# Altium PCB RealimentacionLineal.PcbDoc
Units mm, origin at the board's own origin, x right, y up, seen from the top; angles counter-clockwise.
Board outline 55.88 x 50 mm, 2 copper layers (Top Layer, Bottom Layer); 25 components, 18 nets, 69 pads, 12 vias.
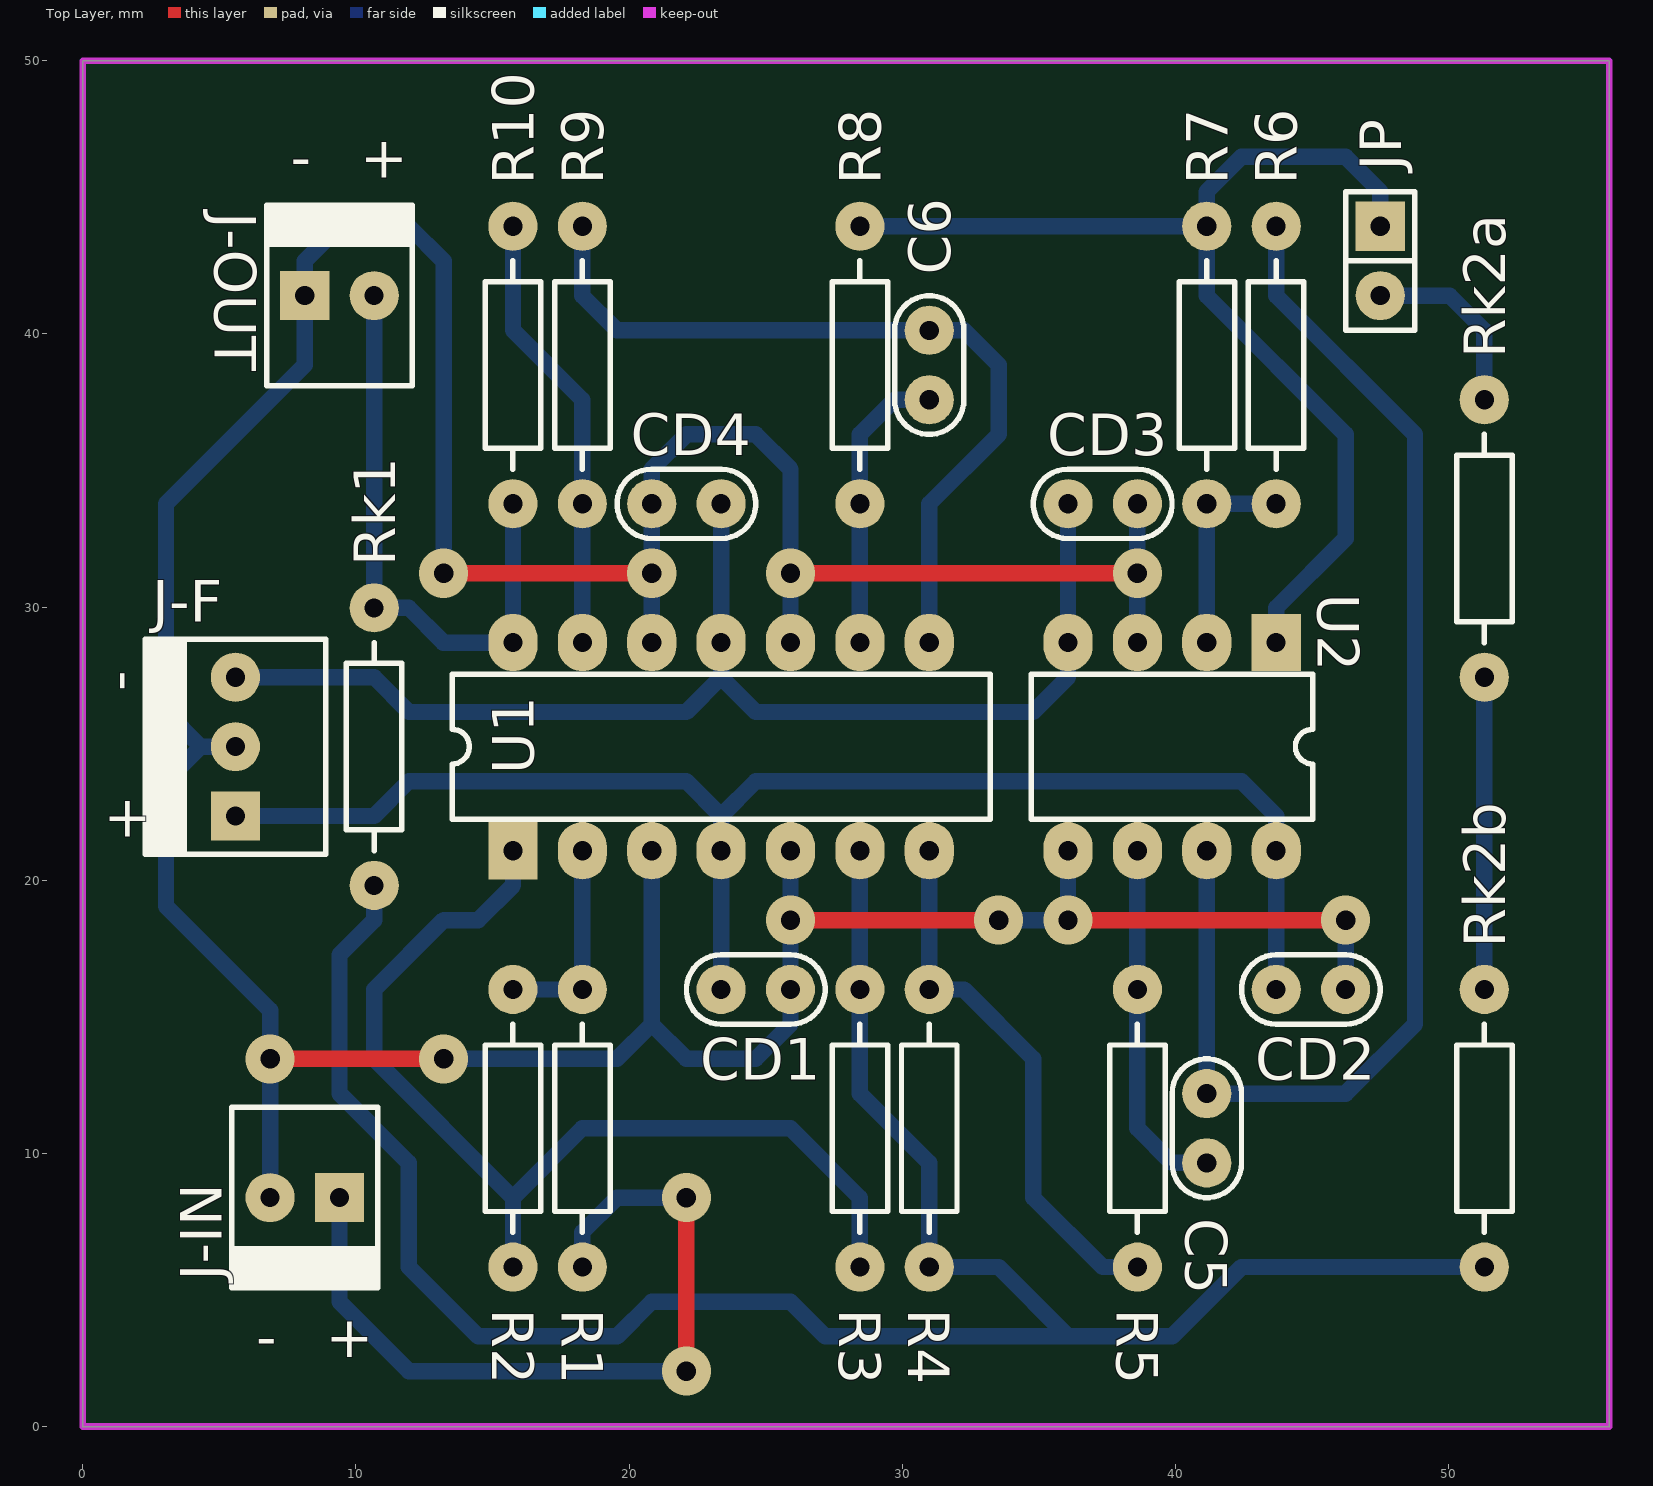
[diagram p0: Top Layer view]
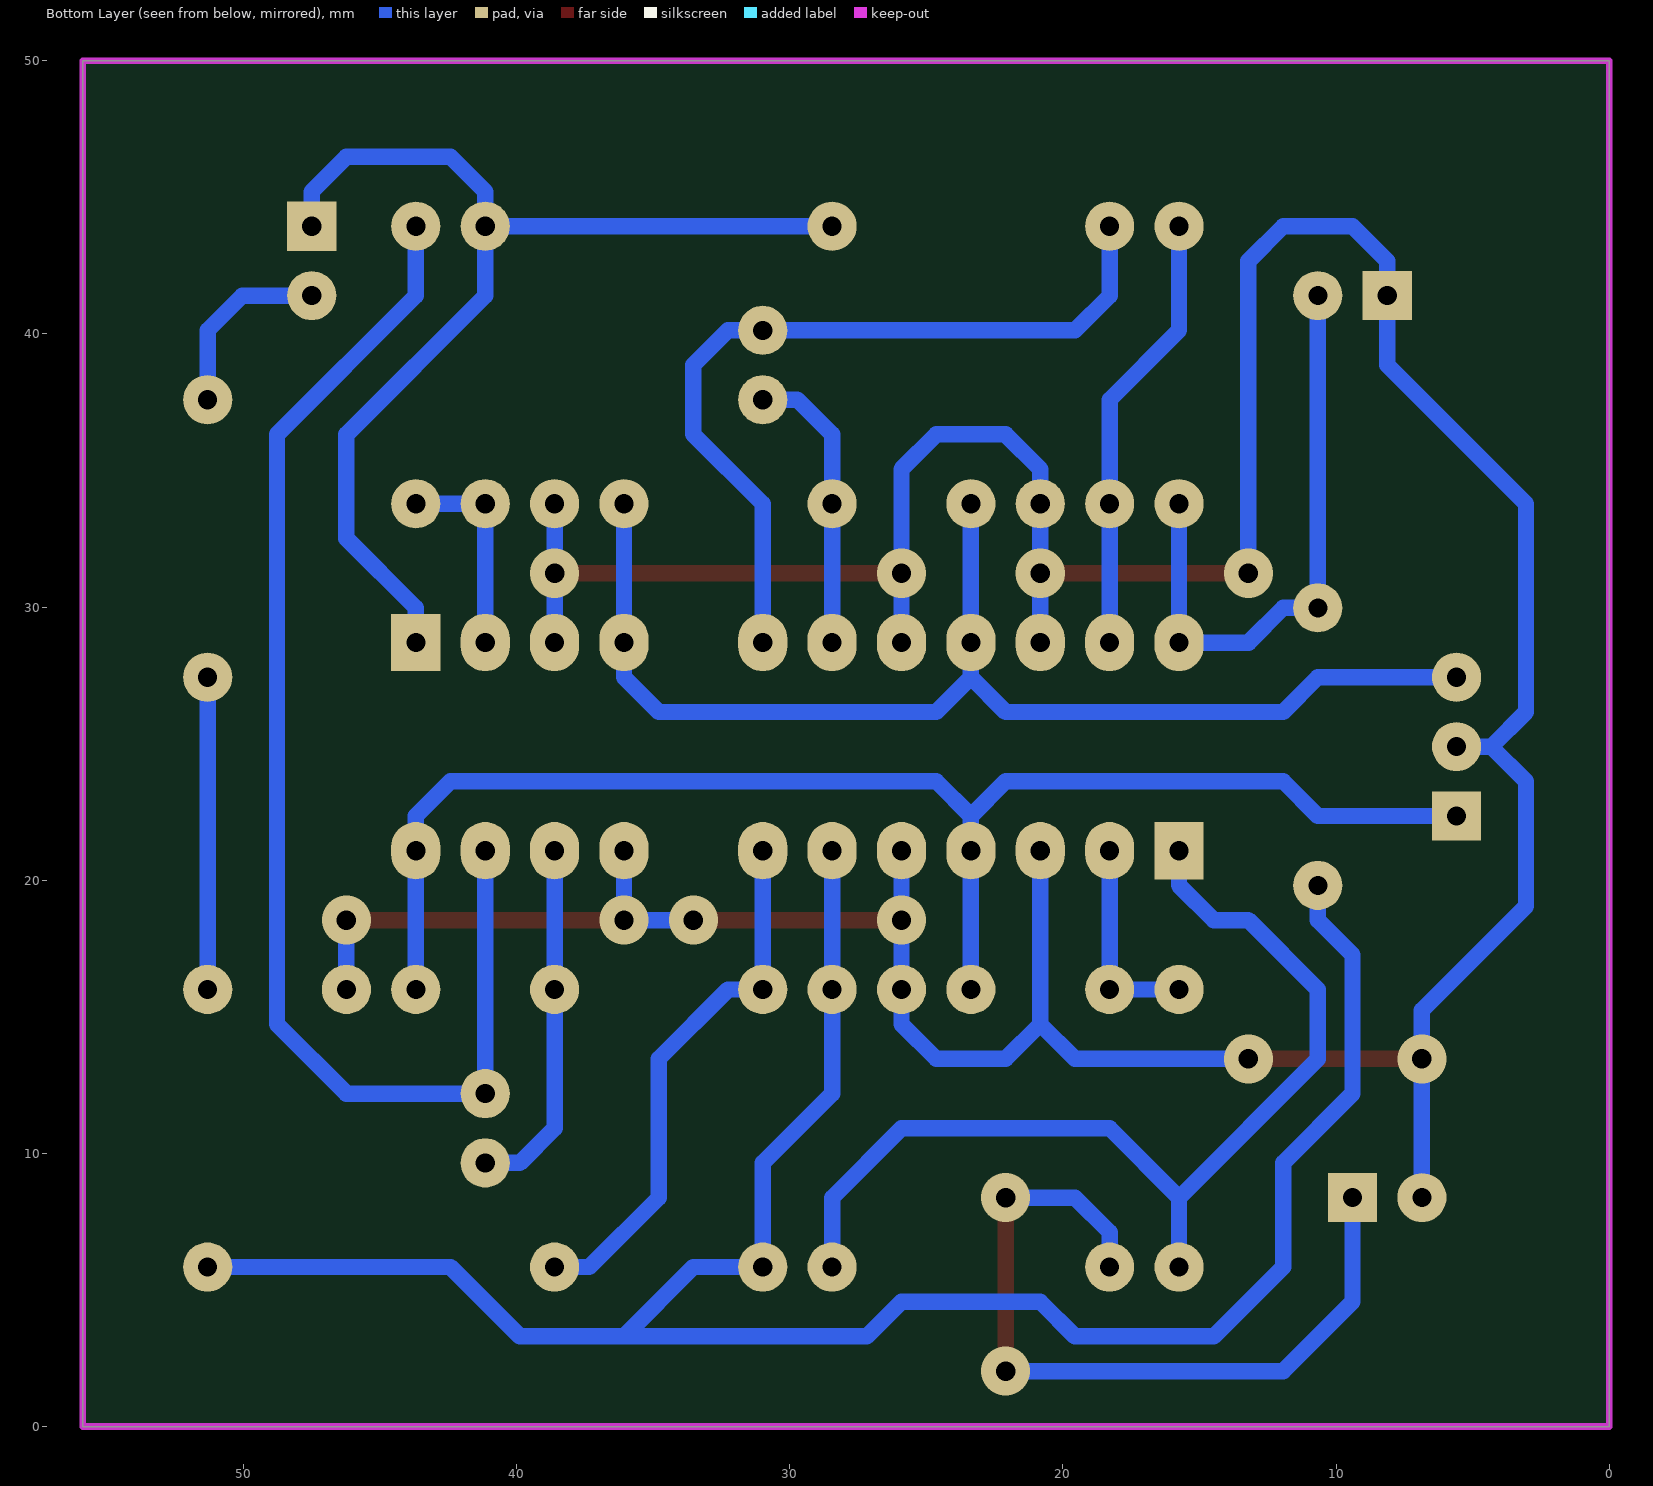
[diagram p1: Bottom Layer view, seen from below]
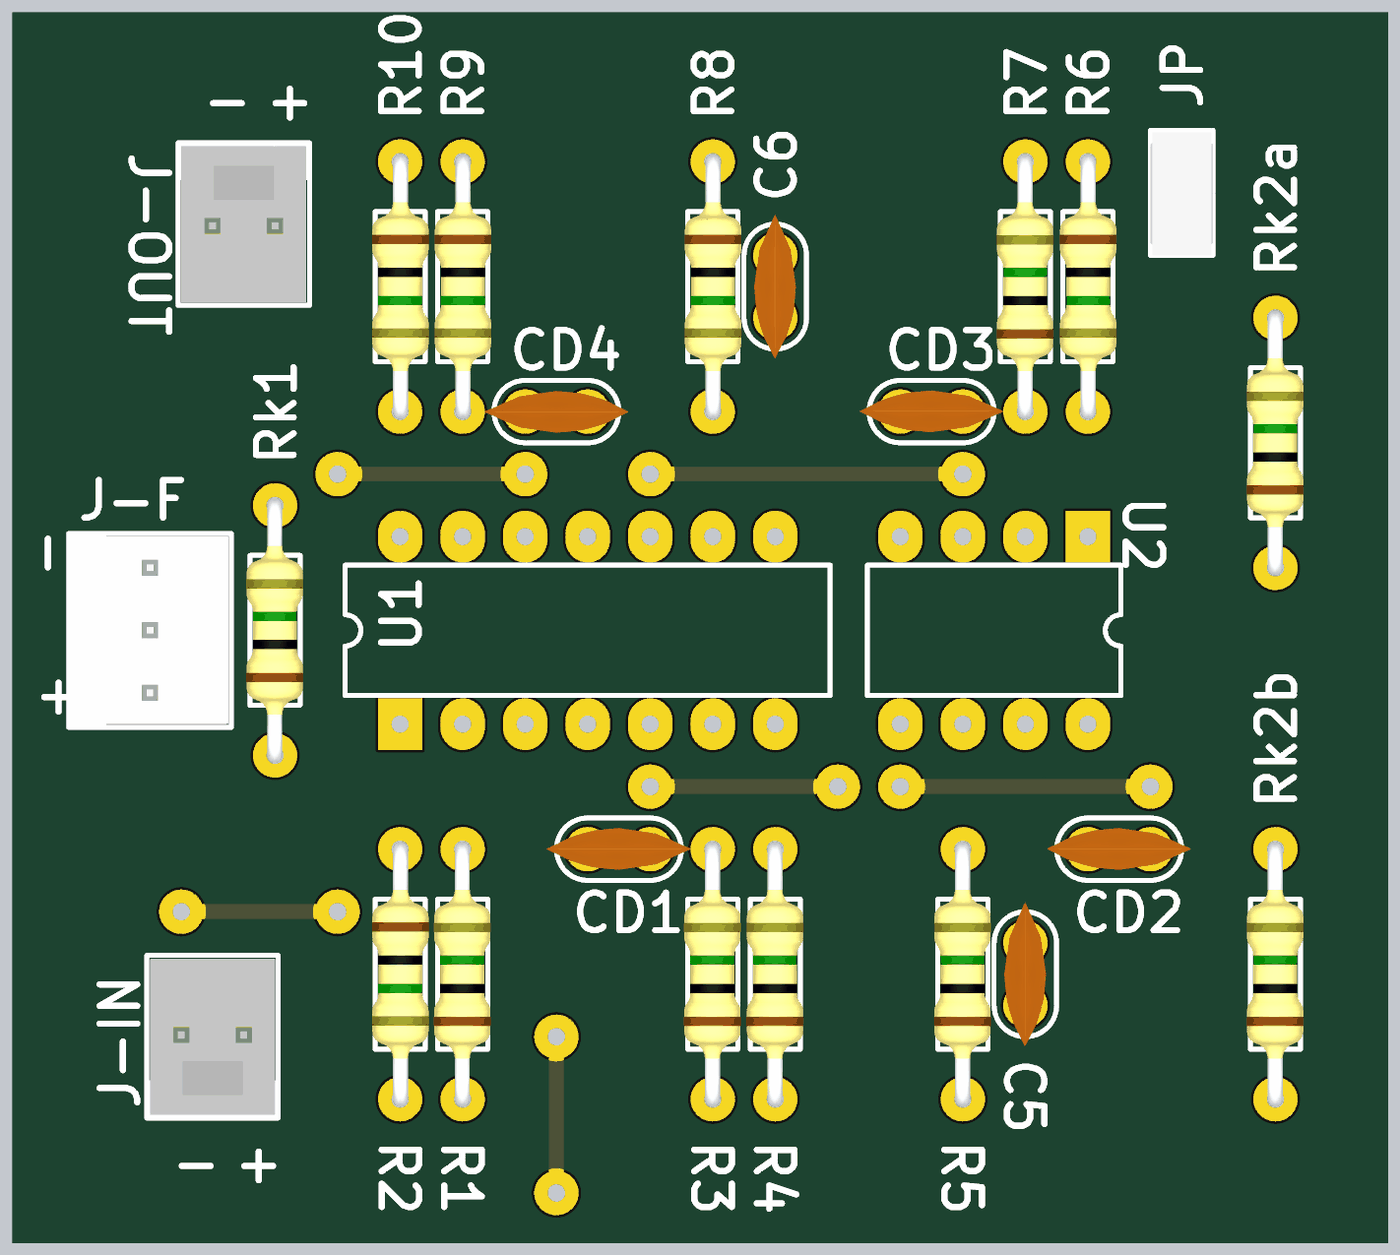
[diagram p2: 3D render of the assembled board from above, using the file's embedded part models]

## Layer stack, top to bottom
Top Solder: solder mask 0.0102, Solder Resist, Dk 3.5
Top Layer: signal copper 0.0356
Dielectric 1: dielectric 0.32, FR-4, Dk 4.8
Bottom Layer: signal copper 0.0356
Bottom Solder: solder mask 0.0102, Solder Resist, Dk 3.5

## Board outline
0,0 0,50 55.88,50 55.88,0

## Design rules (kind name [scope] priority, off if disabled: settings)
Clearance [All] p1: gap=0.6 ignorepadtopadclearanceinfootprint=FALSE
ComponentClearance [All] p1: gap=0.2 collisioncheckmode=3 verticalgap=0.254 showdistances=FALSE
PolygonConnect [All] p1: connectstyle=Relief reliefconductorwidth=0.254 reliefentries=4 polygonreliefangle="90 Angle" airgapwidth=0.254
RoutingVias [All] p1: holewidth=0.711 width=1.8 viastyle="Through Hole" minholewidth=0.711 minwidth=1.8 maxholewidth=0.711 maxwidth=1.8
SolderMaskExpansion [All] p1: expansion=0.102
Width [All] p1: maxlimit=0.6 minlimit=0.6 preferedwidth=0.6
29 further rules are at their usual default settings.

## Components (designator, comment, footprint, x,y, rotation, side; value= is the part's Value field where it differs from the comment)
C5 "1u" CAP100 41.148,10.922 r90 top
C6 "1u" CAP100 30.988,38.862 r90 top
CD1 "100n" CAP100 24.638,16.002 r0 top
CD2 "100n" CAP100 44.958,16.002 r0 top
CD3 "100n" CAP100 37.338,33.782 r0 top
CD4 "100n." CAP100 22.098,33.782 r180 top
J-F "FUENTE" MOLEX3 5.588,22.352 r90 top
J-IN "INPUT" MOLEX2 9.398,8.382 r180 top
J-OUT "OUTPUT" MOLEX2 8.128,41.402 r0 top
JP "JUMPER" JUMPER2 47.498,42.672 r270 top
R1 "10K" RES400 18.288,5.842 r90 top
R2 "10K" RES400 15.748,16.002 r270 top
R3 "10K" RES400 28.448,5.842 r90 top
R4 "10K" RES400 30.988,5.842 r90 top
R5 "100K" RES400 38.608,5.842 r90 top
R6 "10K" RES400 43.688,43.942 r270 top
R7 "10K" RES400 41.148,33.782 r90 top
R8 "47K" RES400 28.448,43.942 r270 top
R9 "10K" RES400 18.288,43.942 r270 top
R10 "10K" RES400 15.748,43.942 r270 top
Rk1 "10K" RES400 10.668,19.812 r90 top
Rk2a "6K8" RES400 51.308,27.432 r90 top
Rk2b "330" RES400 51.308,5.842 r90 top
U1 "TL084N" N014 23.368,24.892 r0 top
U2 "TL082JG" JG008 39.878,24.892 r180 top

## Footprints (in the part's own frame and the unit in brackets; to place one, negate y for a bottom-side part, rotate by r counter-clockwise, add the part's x,y. Pads: shape width x height; smd on the part's side, far side on the other; paste and mask are expansions set on the pad)
CAP100 [mm]
  round 1.8 hole 0.7: 1(-1.27,0) 2(1.27,0)
  silkscreen extent -2.54,-1.27 2.54,1.27, body extent -2.92,-0.84 2.92,0.86, height 6.12
JG008 [mm] "DIP; 8 Leads; Row Spacing 7.62 mm; Pitch 2.54 mm"
  rect 1.8x2.1 hole 0.7: 1(-3.81,-3.81)
  oval 1.8x2.1 hole 0.7: 2(-1.27,-3.81) 3(1.27,-3.81) 4(3.81,-3.81) 5(3.81,3.81) 6(1.27,3.81) 7(-1.27,3.81) 8(-3.81,3.81)
  silkscreen extent -5.15,-2.65 5.15,2.65
JUMPER2 [mm]
  rect 1.8x1.8 hole 0.7: 1(-1.27,0)
  round 1.8 hole 0.7: 2(1.27,0)
  silkscreen extent -2.54,-1.27 2.54,1.27, body extent -2.46,-1.27 2.54,1.27, height 9.5
MOLEX2 [mm]
  rect 1.8x1.8 hole 0.7: 1(0,0)
  round 1.8 hole 0.7: 2(2.54,0)
  silkscreen extent -1.4,-3.3 3.94,3.3, body extent -1.27,-3.17 3.81,3.18, height 10.74
MOLEX3 [mm]
  rect 1.8x1.8 hole 0.7: 1(0,0)
  round 1.8 hole 0.7: 2(2.54,0) 3(5.08,0)
  silkscreen extent -1.4,-3.3 6.48,3.3, body extent -1.27,-3.17 6.35,3.18, height 10.74
N014 [mm] "DIP; 14 Leads; Row Spacing 7.62 mm; Pitch 2.54 mm"
  rect 1.8x2.1 hole 0.7: 1(-7.62,-3.81)
  oval 1.8x2.1 hole 0.7: 2(-5.08,-3.81) 3(-2.54,-3.81) 4(0,-3.81) 5(2.54,-3.81) 6(5.08,-3.81) 7(7.62,-3.81) 8(7.62,3.81) 9(5.08,3.81) 10(2.54,3.81) 11(0,3.81) 12(-2.54,3.81) 13(-5.08,3.81) 14(-7.62,3.81)
  silkscreen extent -9.85,-2.65 9.85,2.65
RES400 [mm]
  round 1.8 hole 0.7: 1(0,0) 2(10.16,0)
  silkscreen extent 1.27,-1.02 8.89,1.02, body extent -0.3,-1.14 10.46,1.17, height 2.43

## Part data
C5 C6 CD1 CD2 CD3 CD4: library part CAP
J-F: library part MOLEX3
J-IN J-OUT: library part MOLEX2
R1 R2 R3 R4 R5 R6 R7 R8 R9 R10 Rk1 Rk2a Rk2b: library part RES
U1 U2: "JFET-Input Operational Amplifier", ComponentLink1Description="Manufacturer Link", ComponentLink1URL=http://www.ti.com/, ComponentLink2Description=Datasheet, DatasheetVersion=Feb-1999, LatestRevisionDate=04-Mar-2005, LatestRevisionNote="Stylized 3D Model Added.", Published=16-Jan-2001, Publisher="Altium Limited"
  U1: ComponentLink2URL=http://www-s.ti.com/sc/ds/tl084.pdf, PackageDescription="DIP; 14 Leads; Row Spacing 7.62 mm; Pitch 2.54 mm", PackageReference=N014, PackageVersion=Oct-1995
  U2: ComponentLink2URL=http://www-s.ti.com/sc/ds/tl082.pdf, PackageDescription="DIP; 8 Leads; Row Spacing 7.62 mm; Pitch 2.54 mm", PackageReference=JG008, PackageVersion=Jan-1995

## Via types
v1: diameter 1.8, hole 0.711, Top Layer to Bottom Layer, 12 vias

## Nets (pads, with @x,y where several pads share a name; then routed paths per layer and width w, separated by ;. In a path a pad name is that pad's centre, name@x,y a point inside that pad or via, vN(x,y) a via of type N, cw(c..) or ccw(c..) an arc to the next point about the centre after c; other vN are vias at no path point)
+12V: CD1.1 CD2.1 J-F.1 U1.4 U2.8 | length 52.9
  Bottom Layer w0.6: J-F.1 10.668,22.352 11.938,23.622 22.098,23.622 23.368,22.352 ; CD1.1 U1.4 23.368,22.352 ; CD2.1 U2.8 43.688,22.352 42.418,23.622 24.638,23.622 23.368,22.352
-12V: CD3.1 CD4.1 J-F.3 U1.11 U2.4 | length 45.3
  Bottom Layer w0.6: J-F.3 10.668,27.432 11.938,26.162 22.098,26.162 23.368,27.432 ; CD4.1 U1.11 23.368,27.432 ; CD3.1 U2.4 36.068,27.432 34.798,26.162 24.638,26.162 23.368,27.432
GND: CD1.2 CD2.2 CD3.2 CD4.2 J-F.2 J-IN.2 J-OUT.1 U1.3 U1.5 U1.10 U1.12 U2.3 U2.5 | length 160.8
  Top Layer w0.6: v1(6.858,13.462) v1(13.208,13.462) ; v1(13.208,31.242) v1(20.828,31.242) ; v1(25.908,18.542) v1(33.528,18.542) ; v1(25.908,31.242) v1(38.608,31.242) ; v1(36.068,18.542) v1(46.228,18.542)
  Bottom Layer w0.6: J-F.2 4.318,24.892 ; J-IN.2 v1(6.858,13.462) 6.858,15.24 3.048,19.05 3.048,23.622 4.318,24.892 ; v1(13.208,13.462) 19.558,13.462 20.828,14.732 ; v1(13.208,31.242) 13.208,42.672 11.938,43.942 9.398,43.942 8.128,42.672 J-OUT.1 8.128,38.862 3.048,33.782 3.048,26.162 4.318,24.892 ; U1.3 20.828,14.732 ; U1.12 v1(20.828,31.242) CD4.2 20.828,35.052 22.098,36.322 24.638,36.322 25.908,35.052 v1(25.908,31.242) U1.10 ; U1.5 v1(25.908,18.542) CD1.2 25.908,14.732 24.638,13.462 22.098,13.462 20.828,14.732 ; v1(33.528,18.542) v1(36.068,18.542) U2.5 ; U2.3 v1(38.608,31.242) CD3.2 ; CD2.2 v1(46.228,18.542)
NetC5_1: C5.1 R5.2 U2.6 | length 13.2
  Bottom Layer w0.6: U2.6 R5.2 38.608,10.922 39.878,9.652 C5.1
NetC5_2: C5.2 R6.1 U2.7 | length 48.9
  Bottom Layer w0.6: U2.7 C5.2 46.228,12.192 48.768,14.732 48.768,36.322 43.688,41.402 R6.1
NetC6_1: C6.1 R8.2 U1.9 | length 10.7
  Bottom Layer w0.6: U1.9 R8.2 28.448,36.322 29.718,37.592 C6.1
NetC6_2: C6.2 R9.1 U1.8 | length 30
  Bottom Layer w0.6: R9.1 18.288,41.402 19.558,40.132 C6.2 32.258,40.132 33.528,38.862 33.528,36.322 30.988,33.782 U1.8
NetJ-IN_1: J-IN.1 R1.1 | length 29.5
  Top Layer w0.6: v1(22.098,2.032) v1(22.098,8.382)
  Bottom Layer w0.6: J-IN.1 9.398,4.572 11.938,2.032 v1(22.098,2.032) ; R1.1 18.288,7.112 19.558,8.382 v1(22.098,8.382)
NetJ-OUT_2: J-OUT.2 R10.2 Rk1.2 U1.14 | length 22.1
  Bottom Layer w0.6: J-OUT.2 Rk1.2 11.932,29.972 13.202,28.702 U1.14 R10.2
NetJP_1: JP.1 R7.2 R8.1 U2.1 | length 41
  Bottom Layer w0.6: R8.1 R7.2 ; U2.1 43.688,29.972 46.228,32.512 46.228,36.322 41.148,41.402 R7.2 ; JP.1 47.498,45.212 46.228,46.482 42.418,46.482 41.148,45.212 R7.2
NetJP_2: JP.2 Rk2a.2 | length 6.9
  Bottom Layer w0.6: JP.2 50.038,41.402 51.308,40.132 Rk2a.2
NetR1_2: R1.2 R2.1 U1.2 | length 7.6
  Bottom Layer w0.6: R2.1 R1.2 U1.2
NetR2_2: R2.2 R3.1 U1.1 | length 37.5
  Bottom Layer w0.6: R2.2 15.748,8.382 ; U1.1 15.748,19.812 14.478,18.542 13.208,18.542 10.668,16.002 10.668,13.456 15.742,8.382 15.748,8.382 ; R3.1 28.448,8.382 25.908,10.922 18.288,10.922 15.748,8.382
NetR3_2: R3.2 R4.1 Rk1.1 Rk2b.1 U1.6 | length 80.5
  Bottom Layer w0.6: Rk1.1 10.668,18.542 9.398,17.272 9.398,12.192 11.938,9.652 11.938,5.842 14.478,3.302 19.558,3.302 20.828,4.572 25.908,4.572 27.178,3.302 36.068,3.302 ; U1.6 R3.2 28.448,12.192 30.988,9.652 R4.1 33.528,5.842 36.068,3.302 ; Rk2b.1 42.418,5.842 39.878,3.302 36.068,3.302
NetR4_2: R4.2 R5.1 U1.7 | length 19.9
  Bottom Layer w0.6: U1.7 R4.2 32.258,16.002 34.798,13.462 34.798,8.382 37.338,5.842 R5.1
NetR6_2: R6.2 R7.1 U2.2 | length 7.6
  Bottom Layer w0.6: U2.2 R7.1 R6.2
NetR9_2: R9.2 R10.1 U1.13 | length 16.3
  Bottom Layer w0.6: R10.1 15.748,40.132 18.288,37.592 R9.2 U1.13
NetRk2a_1: Rk2a.1 Rk2b.2 | length 11.4
  Bottom Layer w0.6: Rk2b.2 Rk2a.1

## Keep-outs
Keep-Out Layer:
  the board outline again, w0.254

## Silkscreen, mask and mechanical layers (free items; w line width, h text height)
Top Overlay:
  text "-" at 7.62,45.72 h1.52
  text "+" at 10.16,45.72 h1.52
  text "-" at 2.032,26.924 h1.52 r90
  text "+" at 0.762,21.59 h1.52
  text "-" at 6.35,2.54 h1.52
  text "+" at 8.89,2.54 h1.52